# EAGLE board LEDS (EAGLE 7.7.0)
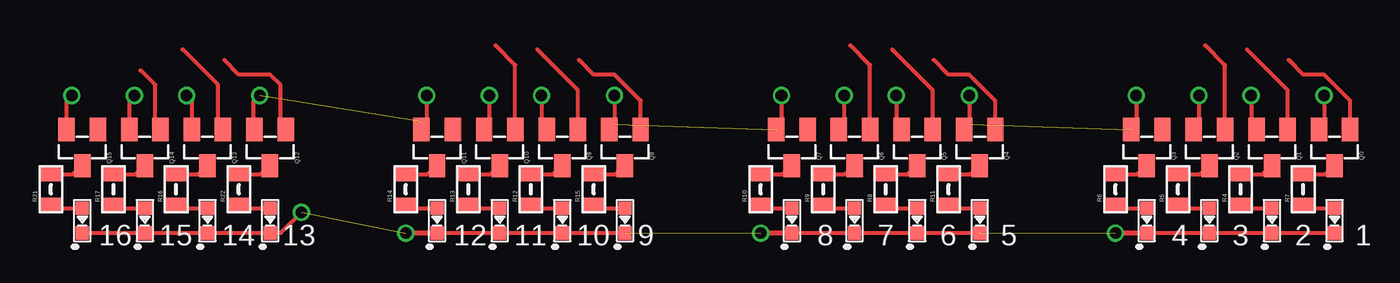
[diagram p0: board, top side]
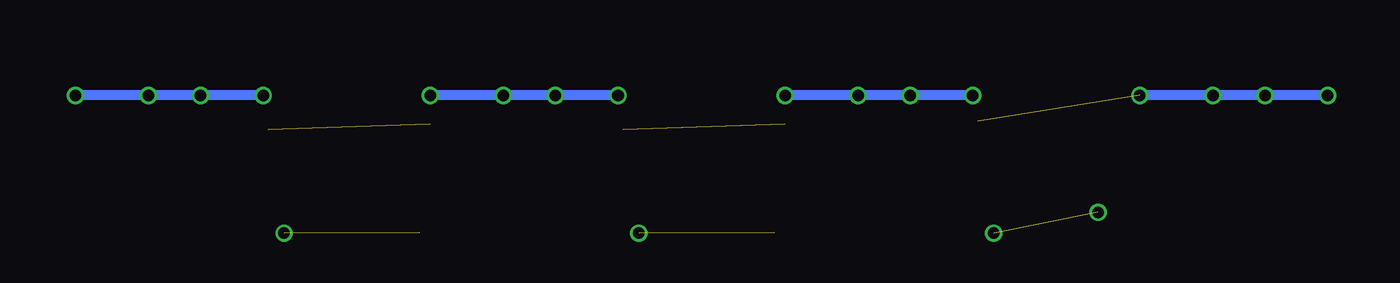
[diagram p1: board, bottom side, seen from below]

No outline drawn. Coordinates in mm, seen from the top.
Copper layers (1*16): Top 0.035mm / dielectric 1.5mm / Bottom 0.035mm
Design rules "default *": minimum track width 5mil, minimum drill 0.2mm, track to track 5mil, track to pad 5mil, pad to pad 5mil, via to via 5mil, smd to smd 5mil, copper to edge 0.4mm, drill to drill 5mil, minimum pad ring 3mil, minimum via ring 3mil, stop-mask expansion 4mil, vias tented up to drill 0mil, thermal gap 10mil
Net classes: 0 default: width 0.254 mm, drill 0.4 mm, clearance 0.127 mm; 1 Power: width 0.254 mm, drill 0.4 mm, clearance 0.127 mm; 2 signals: width 0.254 mm, drill 0.4 mm, clearance 0.127 mm

## Footprints (pad centres in the part's own frame; a part is rotated, then mirrored left to right if it is on the bottom)
0603-LED = smd 0.8 x 0.8: A -0.75,0; C 0.75,0
SOT23 = smd 1 x 1.4: 1 -0.95,-1.1; 2 0.95,-1.1; 3 0,1.1
0805-RES = smd 0.8 x 1.2: 1 -0.9,0; 2 0.9,0

## Placement (x,y rotation side)
LED1  Y  [0603-LED]  87.63,36.83 270 top
LED2  Y  [0603-LED]  83.82,36.83 270 top
LED3  Y  [0603-LED]  80.01,36.83 270 top
LED4  Y  [0603-LED]  76.2,36.83 270 top
LED5  Y  [0603-LED]  62.23,36.83 270 top
LED6  Y  [0603-LED]  58.42,36.83 270 top
LED7  Y  [0603-LED]  54.61,36.83 270 top
LED8  Y  [0603-LED]  66.04,36.83 270 top
LED9  Y  [0603-LED]  40.64,36.83 270 top
LED10  Y  [0603-LED]  36.83,36.83 270 top
LED11  Y  [0603-LED]  33.02,36.83 270 top
LED12  Y  [0603-LED]  44.45,36.83 270 top
LED13  Y  [0603-LED]  19.05,36.83 270 top
LED14  Y  [0603-LED]  15.24,36.83 270 top
LED15  Y  [0603-LED]  11.43,36.83 270 top
LED16  Y  [0603-LED]  22.86,36.83 270 top
Q0  P-FET  [SOT23]  87.63,41.27 180 top
Q1  P-FET  [SOT23]  83.82,41.27 180 top
Q2  P-FET  [SOT23]  80.01,41.27 180 top
Q3  P-FET  [SOT23]  76.2,41.27 180 top
Q4  P-FET  [SOT23]  66.04,41.27 180 top
Q5  P-FET  [SOT23]  62.23,41.27 180 top
Q6  P-FET  [SOT23]  58.42,41.27 180 top
Q7  P-FET  [SOT23]  54.61,41.27 180 top
Q8  P-FET  [SOT23]  44.45,41.27 180 top
Q9  P-FET  [SOT23]  40.64,41.27 180 top
Q10  P-FET  [SOT23]  36.83,41.27 180 top
Q11  P-FET  [SOT23]  33.02,41.27 180 top
Q12  P-FET  [SOT23]  22.86,41.27 180 top
Q13  P-FET  [SOT23]  19.05,41.27 180 top
Q14  P-FET  [SOT23]  15.24,41.27 180 top
Q15  P-FET  [SOT23]  11.43,41.27 180 top
R4  2K0  [0805-RES]  81.92,38.73 90 top
R5  2K0  [0805-RES]  78.11,38.73 90 top
R6  2K0  [0805-RES]  74.3,38.73 90 top
R7  2K0  [0805-RES]  85.72,38.73 90 top
R8  2K0  [0805-RES]  60.33,38.73 90 top
R9  2K0  [0805-RES]  56.52,38.73 90 top
R10  2K0  [0805-RES]  52.7,38.73 90 top
R11  2K0  [0805-RES]  64.14,38.73 90 top
R12  2K0  [0805-RES]  38.73,38.73 90 top
R13  2K0  [0805-RES]  34.92,38.73 90 top
R14  2K0  [0805-RES]  31.11,38.73 90 top
R15  2K0  [0805-RES]  42.55,38.73 90 top
R16  2K0  [0805-RES]  17.14,38.73 90 top
R17  2K0  [0805-RES]  13.34,38.73 90 top
R21  2K0  [0805-RES]  9.53,38.73 90 top
R22  2K0  [0805-RES]  20.95,38.73 90 top

## Library data of the parts
LED1-LED16 Q0 Q1-Q15 R4-R17 R21 R22 = SPCoast

## Nets
GND: LED1.C LED2.C LED3.C LED4.C LED5.C LED6.C LED7.C LED8.C LED9.C LED10.C LED11.C LED12.C LED13.C LED14.C LED15.C LED16.C
N$1: Q4.3 R11.2
N$3: Q5.3 R8.2
N$4: Q6.3 R9.2
N$5: Q7.3 R10.2
N$6: LED8.A R11.1
N$7: LED5.A R8.1
N$8: LED6.A R9.1
N$9: LED7.A R10.1
N$10: Q8.3 R15.2
N$11: Q9.3 R12.2
N$12: Q10.3 R13.2
N$13: Q11.3 R14.2
N$14: LED12.A R15.1
N$15: LED9.A R12.1
N$23: LED10.A R13.1
N$24: LED11.A R14.1
N$28: Q12.3 R22.2
N$29: Q13.3 R16.2
N$30: Q14.3 R17.2
N$31: Q15.3 R21.2
N$32: LED16.A R22.1
N$33: LED13.A R16.1
N$34: LED14.A R17.1
N$35: LED15.A R21.1
N$44: Q0.3 R7.2
N$45: Q1.3 R4.2
N$46: Q2.3 R5.2
N$47: Q3.3 R6.2
N$48: LED1.A R7.1
N$49: LED2.A R4.1
N$50: LED3.A R5.1
N$51: LED4.A R6.1
P1 [signals]: Q0.1
P2 [signals]: Q1.1
P3 [signals]: Q2.1
P4 [signals]: Q3.1
P5: Q4.1
P6: Q5.1
P7: Q6.1
P8: Q7.1
P9 [signals]: Q8.1
P10 [signals]: Q9.1
P11 [signals]: Q10.1
P12 [signals]: Q11.1
P13 [signals]: Q12.1
P14 [signals]: Q13.1
P15 [signals]: Q14.1
P16 [signals]: Q15.1
VCC [Power]: Q0.2 Q1.2 Q2.2 Q3.2 Q4.2 Q5.2 Q6.2 Q7.2 Q8.2 Q9.2 Q10.2 Q11.2 Q12.2 Q13.2 Q14.2 Q15.2

## Tracks (layer width: path | path; a pad name or v marks a point on that pad's centre or on a via)
GND  (via drill 0.7)  (3 unrouted)
  Top 0.254: LED4.C LED3.C LED2.C LED1.C | LED7.C LED6.C LED5.C LED8.C | LED11.C LED10.C LED9.C LED12.C | LED15.C LED14.C LED13.C LED16.C 23.51,36.08 v24.77,37.34
  Top 0.305: LED4.C 76.2,36.07 v74.3,36.07 | LED7.C 54.61,36.07 v52.7,36.07 | LED11.C 33.02,36.07 v31.11,36.07 | LED15.C 11.43,36.07
N$1
  Top 0.254: Q4.3 65.42,39.63 R11.2
N$3
  Top 0.254: Q5.3 61.61,39.63 R8.2
N$4
  Top 0.254: Q6.3 57.8,39.63 R9.2
N$5
  Top 0.254: Q7.3 53.99,39.63 R10.2
N$6
  Top 0.254: R11.1 64.39,37.58 LED8.A
N$7
  Top 0.254: R8.1 60.58,37.58 LED5.A
N$8
  Top 0.254: R9.1 56.77,37.58 LED6.A
N$9
  Top 0.254: R10.1 52.96,37.58 LED7.A
N$10
  Top 0.254: Q8.3 43.83,39.63 R15.2
N$11
  Top 0.254: Q9.3 40.02,39.63 R12.2
N$12
  Top 0.254: Q10.3 36.21,39.63 R13.2
N$13
  Top 0.254: Q11.3 32.4,39.63 R14.2
N$14
  Top 0.254: R15.1 42.8,37.58 LED12.A
N$15
  Top 0.254: R12.1 38.99,37.58 LED9.A
N$23
  Top 0.254: R13.1 35.18,37.58 LED10.A
N$24
  Top 0.254: R14.1 31.37,37.58 LED11.A
N$28
  Top 0.254: Q12.3 22.24,39.63 R22.2
N$29
  Top 0.254: Q13.3 18.43,39.63 R16.2
N$30
  Top 0.254: Q14.3 14.62,39.63 R17.2
N$31
  Top 0.254: Q15.3 10.81,39.63 R21.2
N$32
  Top 0.254: R22.1 21.21,37.58 LED16.A
N$33
  Top 0.254: R16.1 17.4,37.58 LED13.A
N$34
  Top 0.254: R17.1 13.59,37.58 LED14.A
N$35
  Top 0.254: R21.1 9.78,37.58 LED15.A
N$44
  Top 0.254: Q0.3 87.01,39.63 R7.2
N$45
  Top 0.254: Q1.3 83.2,39.63 R4.2
N$46
  Top 0.254: Q2.3 79.39,39.63 R5.2
N$47
  Top 0.254: Q3.3 75.58,39.63 R6.2
N$48
  Top 0.254: R7.1 85.98,37.58 LED1.A
N$49
  Top 0.254: R4.1 82.17,37.58 LED2.A
N$50
  Top 0.254: R5.1 78.36,37.58 LED3.A
N$51
  Top 0.254: R6.1 74.55,37.58 LED4.A
P1
  Top 0.254: Q0.1 88.58,44.13 87,45.72 85.72,45.72 84.84,46.61
P2
  Top 0.254: Q1.1 84.77,44.77 82.3,47.24
P3
  Top 0.254: Q2.1 80.96,46.29 79.76,47.5
P4
  Top 0.254: Q3.1 77.47,42.7 77.22,42.95
P5
  Top 0.254: Q4.1 66.99,44.13 65.41,45.72 64.14,45.72 63.25,46.61
P6
  Top 0.254: Q5.1 63.18,44.77 60.71,47.24
P7
  Top 0.254: Q6.1 59.37,46.29 58.17,47.5
P8
  Top 0.254: 55.63,42.95 55.88,42.7 Q7.1 55.63,42.44
P9
  Top 0.254: Q8.1 45.4,44.13 43.81,45.72 42.55,45.72 41.66,46.61
P10
  Top 0.254: Q9.1 41.59,44.77 39.12,47.24
P11
  Top 0.254: Q10.1 37.78,46.29 36.58,47.5
P12
  Top 0.254: Q11.1 34.29,42.7 34.04,42.95
P13
  Top 0.254: Q12.1 23.5,42.69 23.5,45.09 22.86,45.72 20.95,45.72 20.07,46.61
P14
  Top 0.254: Q13.1 19.68,42.69 19.68,45.09 17.53,47.24
P15
  Top 0.254: Q14.1 15.88,42.69 15.88,45.09 14.99,45.97
P16
  Top 0.254: Q15.1 12.45,42.44
VCC  (via drill 0.7)  (3 unrouted)
  Top 0.254: 86.61,42.93 86.68,42.86 86.68,42.23 86.36,41.91 86.36,42.05 Q0.2 87,42.69 v87,44.45 | 82.93,42.93 82.87,42.87 82.87,42.23 82.55,41.91 82.55,42.7 | 79.12,42.93 79.06,42.87 79.2,42.87 79.38,42.69 | 75.31,42.93 75.25,42.87 75.39,42.87 75.56,42.69 | v75.56,44.45 75.56,42.69 | 75.56,42.69 Q3.2 | v79.38,44.45 79.38,42.69 | 79.38,42.69 Q2.2 | v82.55,44.45 82.55,42.7 | 82.55,42.7 Q1.2 | 65.02,42.93 65.09,42.86 65.09,42.23 64.77,41.91 64.77,42.05 Q4.2 65.41,42.69 v65.41,44.45 | 61.34,42.93 61.28,42.87 Q5.2 60.96,42.7 v60.96,44.45 | 53.72,42.93 53.66,42.87 53.8,42.87 53.98,42.69 | v53.98,44.45 53.98,42.69 | 53.98,42.69 Q7.2 | v57.78,44.45 57.78,42.69 Q6.2 57.15,42.05 | 43.43,42.93 43.5,42.86 43.18,42.54 43.18,42.05 | 39.75,42.93 39.69,42.87 Q9.2 39.37,42.7 v39.37,44.45 | 35.94,42.93 35.88,42.87 36.02,42.87 36.2,42.69 | 32.13,42.93 32.07,42.87 32.21,42.87 32.38,42.69 | v32.38,44.45 32.38,42.69 | 32.38,42.69 Q11.2 | v36.2,44.45 36.2,42.69 | 36.2,42.69 Q10.2 | v43.81,44.45 43.81,42.69 Q8.2 43.18,42.05 | 18.16,42.93 18.1,42.87 | 14.35,42.93 14.29,42.87 | 10.54,42.93 10.48,42.87 | 10.48,42.87 10.48,44.13 v10.79,44.45 | v14.61,44.45 14.29,44.13 14.29,42.87 | v17.78,44.45 18.1,44.13 18.1,42.87 | v22.23,44.45 21.84,44.07 21.84,42.93 21.91,42.86 21.59,42.54 21.59,42.05 | 43.18,42.05 43.18,41.91 | 57.15,42.05 57.15,41.91 | 57.53,42.93 57.15,42.55 57.15,42.05 | Q15.2 10.48,42.87 | Q14.2 14.29,42.87 | Q13.2 18.1,42.87 | Q12.2 21.59,42.05 | 21.59,42.05 21.59,41.91
  Bottom 0.61: v75.56,44.45 v79.38,44.45 v82.55,44.45 v87,44.45 | v53.98,44.45 v57.78,44.45 v60.96,44.45 v65.41,44.45 | v32.38,44.45 v36.2,44.45 v39.37,44.45 v43.81,44.45 | v10.79,44.45 v14.61,44.45 v17.78,44.45 v22.23,44.45

## Text on the board
tPlace: 16 | 15 | 14 | 13 | 12 | 11 | 10 | 9 | 8 | 7 | 6 | 5 | 4 | 3 | 2 | 1